# EAGLE board Pro Trinket-Micro Keyboard Jr v1 (EAGLE 7.4.0)
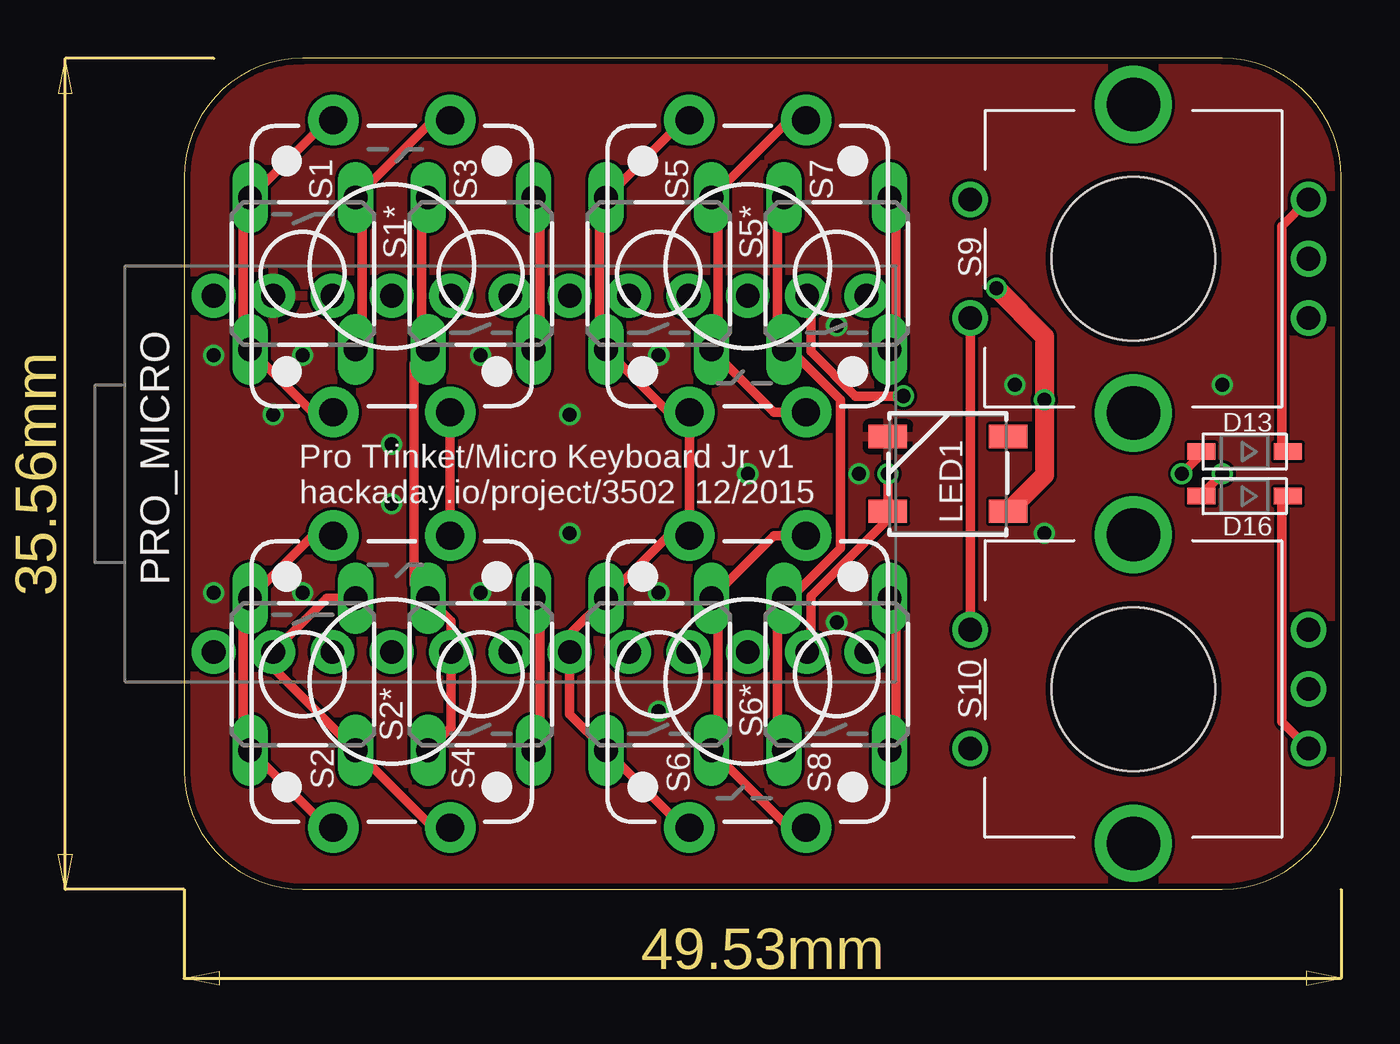
[diagram p0: board, top side]
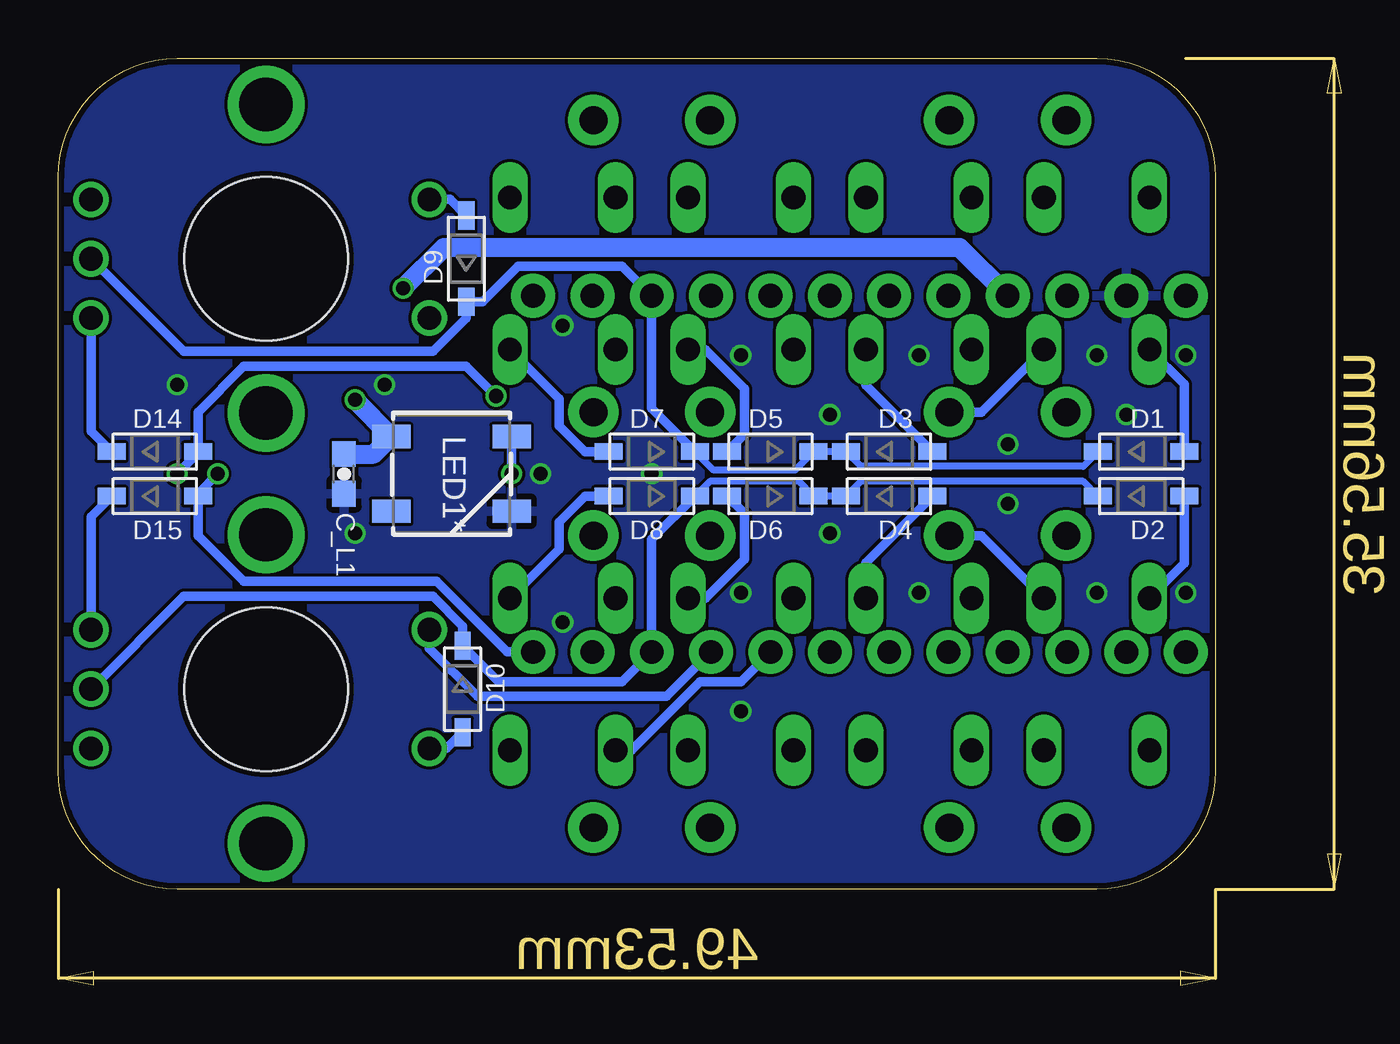
[diagram p1: board, bottom side, seen from below]

Size 49.53 x 35.56 mm. Coordinates in mm from the lower left corner, seen from the top.
Outline: 0,30.48 0,5.08 arc90 5.08,0 44.45,0 arc90 49.53,5.08 49.53,30.48 arc90 44.45,35.56 5.08,35.56 arc90 0,30.48
Copper layers (1*16): Top 0.035mm / dielectric 1.5mm / Bottom 0.035mm
Design rules "dirt_cheap_dirty_boards.v1": minimum track width 5mil, minimum drill 12mil, track to track 5mil, track to pad 5mil, pad to pad 5mil, via to via 5mil, smd to smd 0mil, copper to edge 10mil, drill to drill 10mil, minimum pad ring 10mil, minimum via ring 6mil, stop-mask expansion 2mil, vias tented up to drill 25mil, thermal gap 10mil
Holes 7 mm at 40.64,26.99 40.64,8.57

## Footprints (pad centres in the part's own frame; a part is rotated, then mirrored left to right if it is on the bottom)
0603-CAP = smd 1.1 x 1: 1 -0.85,0; 2 0.85,0
SOD-123 = smd 1.2 x 0.7: A 1.85,0; C -1.85,0
WS2812B = smd 1.651 x 1: 1 -2.577,1.6; 2 -2.577,-1.6; 3 2.577,-1.6; 4 2.577,1.6
ARDUINO_PRO_MICRO = drill 1.016 pad 1.88: 1 -7.62,12.7; 2 -7.62,10.16; 3 -7.62,7.62; 4 -7.62,5.08; 5 -7.62,2.54; 6 -7.62,0; 7 -7.62,-2.54; 8 -7.62,-5.08; 9 -7.62,-7.62; 10 -7.62,-10.16; 11 -7.62,-12.7; 12 -7.62,-15.24; 13 7.62,-15.24; 14 7.62,-12.7; 15 7.62,-10.16; 16 7.62,-7.62; 17 7.62,-5.08; 18 7.62,-2.54; 19 7.62,0; 20 7.62,2.54; 21 7.62,5.08; 22 7.62,7.62; 23 7.62,10.16; 24 7.62,12.7
TAC-SWITCH-PTH = drill 1.016 pad 1.524 long: 1 -3.251,2.261; 2 3.251,2.261; 3 -3.251,-2.261; 4 3.251,-2.261
TACTILE-PTH-12MM = drill 1.2 pad 2.159: 1 6.25,-2.5; 2 -6.25,-2.5; 3 6.25,2.5; 4 -6.25,2.5
ROTARY_ENC_PLAIN = drill 1.016: A 7.493,-2.54; B 7.493,2.54; C 7.493,0; SW+ -6.985,2.54; SW- -6.985,-2.54 | drill 2.286: P$3 0,6.604; P$4 0,-6.604

## Placement (x,y rotation side)
C_L1  0.1uF  [0603-CAP]  37.31,17.78 90 bottom
D1  [SOD-123]  3.17,18.73 0 bottom
D2  [SOD-123]  3.17,16.83 0 bottom
D3  [SOD-123]  13.97,18.73 0 bottom
D4  [SOD-123]  13.97,16.83 0 bottom
D5  [SOD-123]  19.05,18.73 180 bottom
D6  [SOD-123]  19.05,16.83 180 bottom
D7  [SOD-123]  24.13,18.73 180 bottom
D8  [SOD-123]  24.13,16.83 180 bottom
D9  [SOD-123]  32.07,26.99 90 bottom
D10  [SOD-123]  32.23,8.57 270 bottom
D13  [SOD-123]  45.4,18.73 180 top
D14  [SOD-123]  45.4,18.73 0 bottom
D15  [SOD-123]  45.4,16.83 0 bottom
D16  [SOD-123]  45.4,16.83 180 top
LED1  [WS2812B]  32.7,17.78 180 top
LED1*  [WS2812B]  32.7,17.78 0 bottom
PRO_MICRO  [ARDUINO_PRO_MICRO]  13.97,17.78 90 top
S1  [TAC-SWITCH-PTH]  5.08,26.35 270 top
S1*  [TACTILE-PTH-12MM]  8.89,26.67 90 top
S2  [TAC-SWITCH-PTH]  5.08,9.21 270 top
S2*  [TACTILE-PTH-12MM]  8.89,8.89 90 top
S3  [TAC-SWITCH-PTH]  12.7,26.35 90 top
S4  [TAC-SWITCH-PTH]  12.7,9.21 90 top
S5  [TAC-SWITCH-PTH]  20.32,26.35 90 top
S5*  [TACTILE-PTH-12MM]  24.13,26.67 270 top
S6  [TAC-SWITCH-PTH]  20.32,9.21 90 top
S6*  [TACTILE-PTH-12MM]  24.13,8.89 270 top
S7  [TAC-SWITCH-PTH]  27.94,26.35 90 top
S8  [TAC-SWITCH-PTH]  27.94,9.21 90 top
S9  ROTARTY_ENCODER  [ROTARY_ENC_PLAIN]  40.64,26.99 0 top
S10  ROTARTY_ENCODER  [ROTARY_ENC_PLAIN]  40.64,8.57 0 top

## Library data of the parts
C_L1 = SparkFun-Capacitors; PROD_ID: CAP-07876
D1-D10 D13-D16 = adafruit
LED1 LED1* = SparkFun-LED
PRO_MICRO = SparkFun-Boards
S1-S8 = GeekAmmo
S1* S2* S5* S6* = SparkFun-Electromechanical; PROD_ID: SWCH-09185
S9 S10 = SparkFun-Electromechanical

## Nets
D0: PRO_MICRO.2 S1*.1 S1*.2 S1.1 S1.2 S2*.1 S2*.2 S2.1 S2.2
D1: PRO_MICRO.1
D2: PRO_MICRO.5 S3.1 S3.2 S4.1 S4.2
D4: PRO_MICRO.7 S5*.1 S5*.2 S5.1 S5.2 S6*.1 S6*.2 S6.1 S6.2
D5: PRO_MICRO.8 S7.1 S7.2 S8.1 S8.2
D6: PRO_MICRO.9 S9.SW- S10.SW+
D7: D2.C D4.C D6.C D8.C D10.C PRO_MICRO.10 S10.C
D8: LED1*.4 LED1.4 PRO_MICRO.11
D9: D13.A D15.A PRO_MICRO.12
D14: D1.C D3.C D5.C D7.C D9.C PRO_MICRO.15 S9.C
D15: PRO_MICRO.16
D16: D14.A D16.A PRO_MICRO.14
D18: PRO_MICRO.17
D19: PRO_MICRO.18
D20: PRO_MICRO.19
D21: PRO_MICRO.20
GND: C_L1.1 LED1*.3 LED1.3 PRO_MICRO.23
N$1: D9.A S9.SW+
N$34: D10.A S10.SW-
N$41: D16.C S10.A
N$42: D15.C S10.B
N$43: D14.C S9.A
N$44: D13.C S9.B
S1NODE: D1.A S1*.3 S1*.4 S1.3 S1.4
S2NODE: D2.A S2*.3 S2*.4 S2.3 S2.4
S3NODE: D3.A S3.3 S3.4
S4NODE: D4.A S4.3 S4.4
S5NODE: D5.A S5*.3 S5*.4 S5.3 S5.4
S6NODE: D6.A S6*.3 S6*.4 S6.3 S6.4
S7NODE: D7.A S7.3 S7.4
S8NODE: D8.A S8.3 S8.4
VCC: C_L1.2 LED1*.1 LED1.1 PRO_MICRO.21

## Tracks (layer width: path | path; a pad name or v marks a point on that pad's centre or on a via)
D0
  Top 0.406: S1.2 7.62,23.38 7.62,29.32 S1.1 10.66,32.92 S1*.1 | S2*.2 10.66,2.64 S2.2 3.81,9.49 PRO_MICRO.2 6.11,12.46 S2.1 | S2*.1 S1*.2
  Bottom 0.406: S1*.2 10.02,20.42 S1.2 | S2*.1 10.02,15.14 S2.1
D2
  Top 0.406: S3.2 10.16,29.32 10.16,23.38 S3.1 9.84,22.5 9.84,13.06 S4.2 11.43,11.47 PRO_MICRO.5 11.43,6.95 S4.1
D4
  Top 0.406: S5*.2 21.38,32.92 S5.2 17.78,29.32 17.78,23.38 S5.1 20.74,20.42 S5*.1 S6*.2 20.74,15.14 S6.2 16.51,10.91 PRO_MICRO.7 16.51,7.51 S6.1 21.38,2.64 S6*.1
D5
  Top 0.406: S7.2 25.4,29.32 25.4,23.38 S7.1 25.95,23.1 28.1,20.95 28.1,14.61 25.95,12.46 S8.2 25.4,12.18 25.4,6.24 S8.1
  Bottom 0.406: PRO_MICRO.8 20.32,8.89 22.07,8.89 25,5.96 S8.1
D6
  Top 0.406: S10.SW+ S9.SW-
  Bottom 0.406: PRO_MICRO.9 23.5,8.26 31.59,8.26 33.66,10.32 S10.SW+
D7
  Bottom 0.305: D2.C 5.66,17.46 15.19,17.46 D4.C D6.C 17.84,17.46 21.64,17.46 D8.C
  Bottom 0.406: D8.C 24.13,14.98 PRO_MICRO.10 25.4,8.89 30.69,8.89 D10.C 32.23,11.27 33.5,12.54 44.16,12.54 S10.C
D8  (via drill 0.6)
  Top 0.406: PRO_MICRO.11 26.83,10.32 26.83,12.54 30.12,15.84 LED1.4 | 29.83,16.18 LED1.4 | LED1.4 v30.12,17.78
  Bottom 0.406: v30.12,17.78 LED1*.4
D9  (via drill 0.6)
  Top 0.406: D13.A 43.55,18.63 v42.7,17.78
  Bottom 0.406: v42.7,17.78 43.55,16.93 D15.A 43.55,15.14 41.59,13.18 33.34,13.18 30.32,10.16 PRO_MICRO.12
D14
  Bottom 0.305: D1.C 5.66,18.1 15.19,18.1 D3.C D5.C 17.99,17.94 21.49,17.94 D7.C
  Bottom 0.406: D7.C 24.13,20.58 PRO_MICRO.15 25.4,26.67 29.84,26.67 31.38,25.14 D9.C 32.07,24.45 33.5,23.02 44.16,23.02 S9.C
D16  (via drill 0.6)
  Top 0.406: v44.45,17.78 43.55,16.88 D16.A | PRO_MICRO.14 26.83,25.24 26.83,23.02 28.73,21.11 v30.8,21.11
  Bottom 0.406: v44.45,17.78 43.55,18.68 D14.A 43.55,20.42 41.59,22.38 32.07,22.38 v30.8,21.11
GND  (via drill 0.6)
  other vias: 5.08,22.86 3.81,20.32 16.51,20.32 16.51,15.24 1.27,22.86 1.27,12.7 24.13,17.78 35.56,21.59 36.83,15.24 20.32,7.62 5.08,12.7 12.7,12.7 8.89,19.05 8.89,16.51 12.7,22.86 20.32,22.86 20.32,12.7 28.89,17.78 27.94,24.13 27.94,11.43 44.45,21.59
  pour Bottom: 0,0 49.53,0 49.53,35.56 0,35.56
  pour Top: 0,0 49.53,0 49.53,35.56 0,35.56
N$1
  Bottom 0.406: D9.A 32.76,29.53 S9.SW+
N$34
  Bottom 0.406: D10.A 32.92,6.03 S10.SW-
N$41
  Top 0.406: D16.C 46.99,16.57 46.99,7.18 S10.A
N$42
  Bottom 0.406: S10.B 48.13,15.95 D15.C
N$43
  Bottom 0.406: S9.A 48.13,19.61 D14.C
N$44
  Top 0.406: D13.C 46.99,19 46.99,28.38 S9.B
S1NODE
  Top 0.406: S1*.4 5.5,20.42 S1.4 2.54,23.38 2.54,29.32 S1.3 6.14,32.92 S1*.3
  Bottom 0.406: D1.A 1.32,21.61 S1.4
S2NODE
  Top 0.406: S2*.4 6.14,2.64 S2.4 2.54,6.24 2.54,12.18 S2.3 5.5,15.14 S2*.3
  Bottom 0.406: D2.A 1.32,13.95 S2.3
S3NODE
  Top 0.406: S3.4 15.24,29.32 15.24,23.38 S3.3
  Bottom 0.406: D3.A 14.96,21.57 S3.3
S4NODE
  Top 0.406: S4.3 15.24,6.24 15.24,12.18 S4.4
  Bottom 0.406: D4.A 14.96,13.99 S4.4
S5NODE
  Top 0.406: S5*.4 25.9,32.92 S5.4 22.86,29.32 22.86,23.38 S5.3 25.26,20.42 S5*.3
  Bottom 0.406: D5.A 20.16,19.47 20.16,21.43 21.83,23.1 S5.3
S6NODE
  Top 0.406: S6*.3 25.9,2.64 S6.3 22.86,6.24 22.86,12.18 S6.4 25.26,15.14 S6*.4
  Bottom 0.406: D6.A 20.16,16.09 20.16,14.13 21.83,12.46 S6.4
S7NODE
  Top 0.406: S7.4 30.48,29.32 30.48,23.38 S7.3
  Bottom 0.406: S7.3 28.1,21 28.1,19.84 26.99,18.73 D7.A
S8NODE
  Top 0.406: S8.3 30.48,6.24 30.48,12.18 S8.4
  Bottom 0.406: S8.4 28.1,14.56 28.1,15.72 26.99,16.83 D8.A
VCC  (via drill 0.6)
  Top 0.813: v34.77,25.72 36.83,23.65 v36.83,20.95 36.83,17.73 LED1.1
  Bottom 0.813: PRO_MICRO.21 10.95,27.46 33.02,27.46 v34.77,25.72 | C_L1.2 36.03,18.63 LED1*.1 36.83,20.93 v36.83,20.95

## Text on the board
tNames: S1* | S5* | Pro Trinket/Micro Keyboard Jr v1 / hackaday.io/project/3502 12/2015 | S6* | S2*